# Altium PCB PCB1.PcbDoc
Units mil, origin at the board's own origin, x right, y up, seen from the top; angles counter-clockwise.
Board outline 3149.61 x 2362.2 mil, 2 copper layers (Top Layer, Bottom Layer); 83 components, 35 nets, 221 pads, 56 vias.
Unrouted connection lines stored in the file: 39.
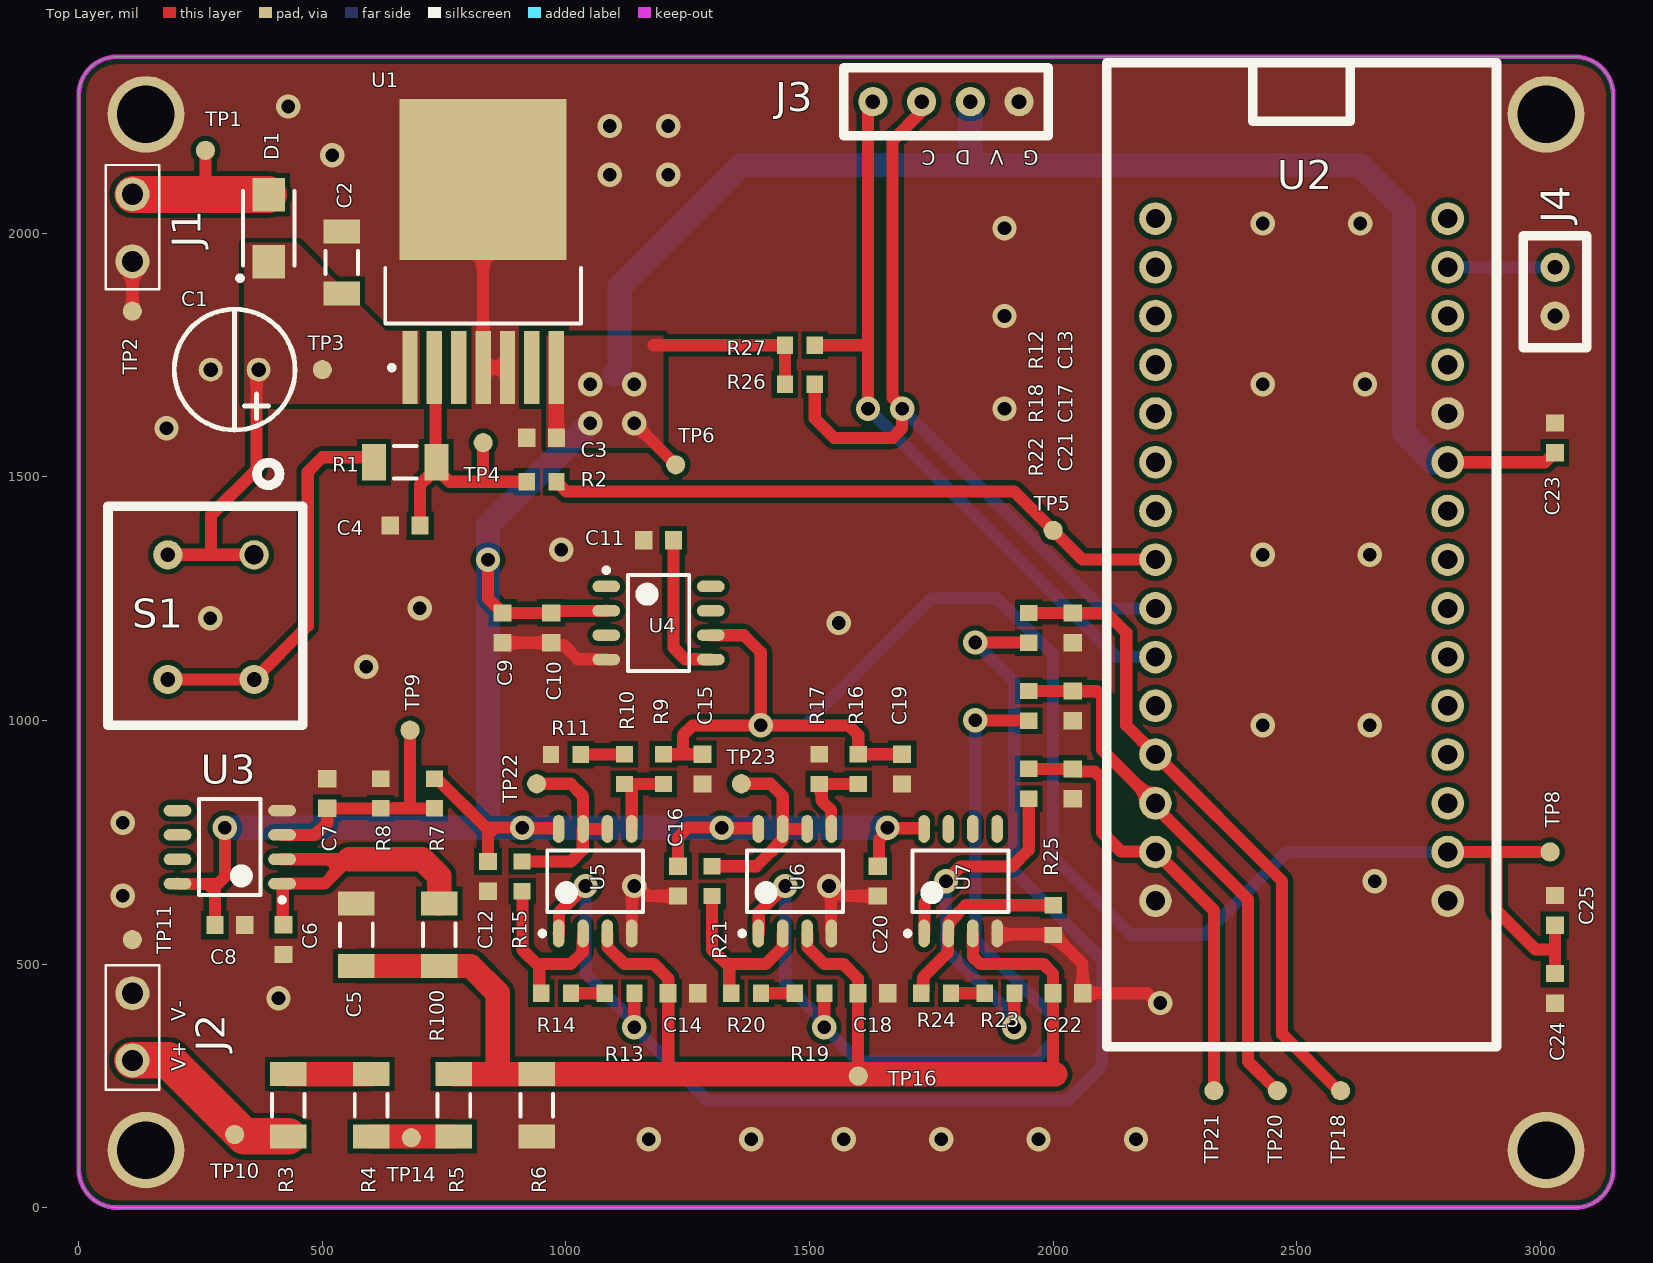
[diagram p0: Top Layer view]
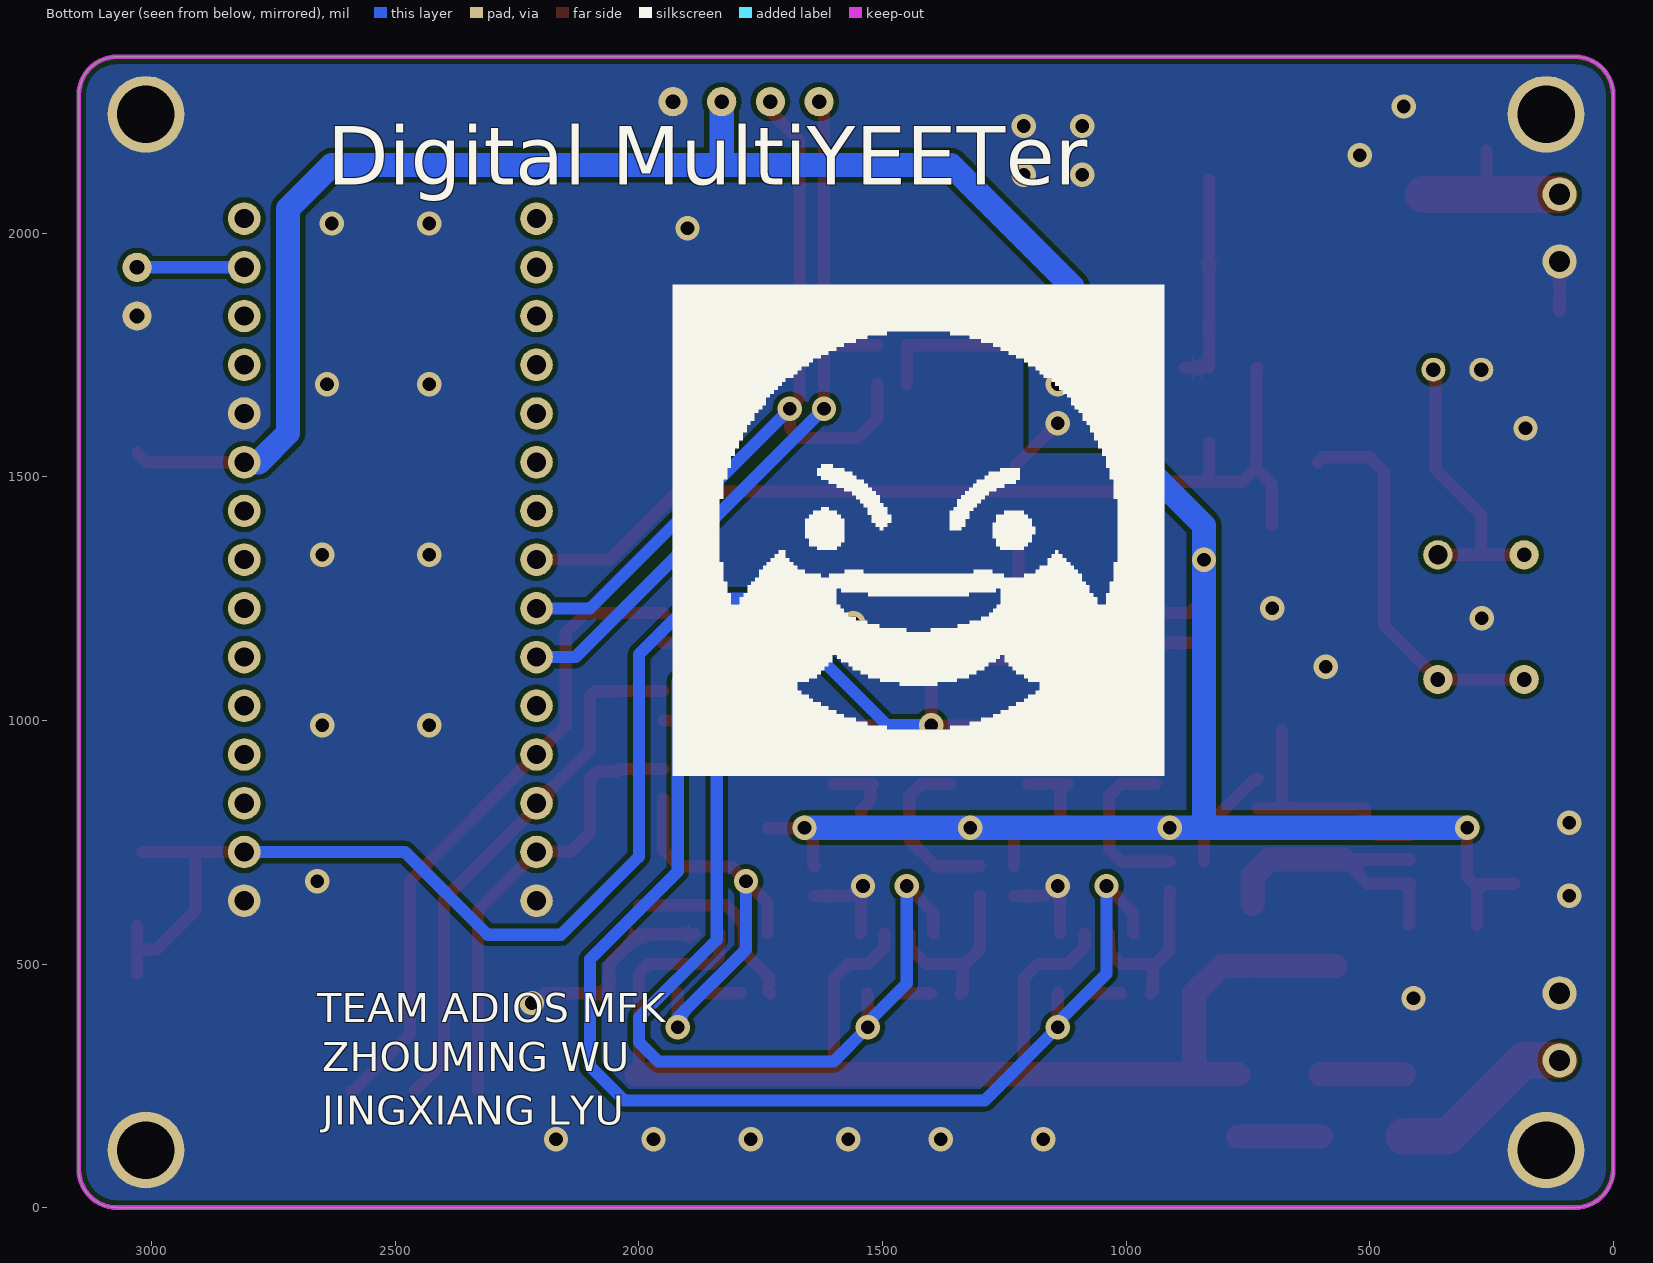
[diagram p1: Bottom Layer view, seen from below]
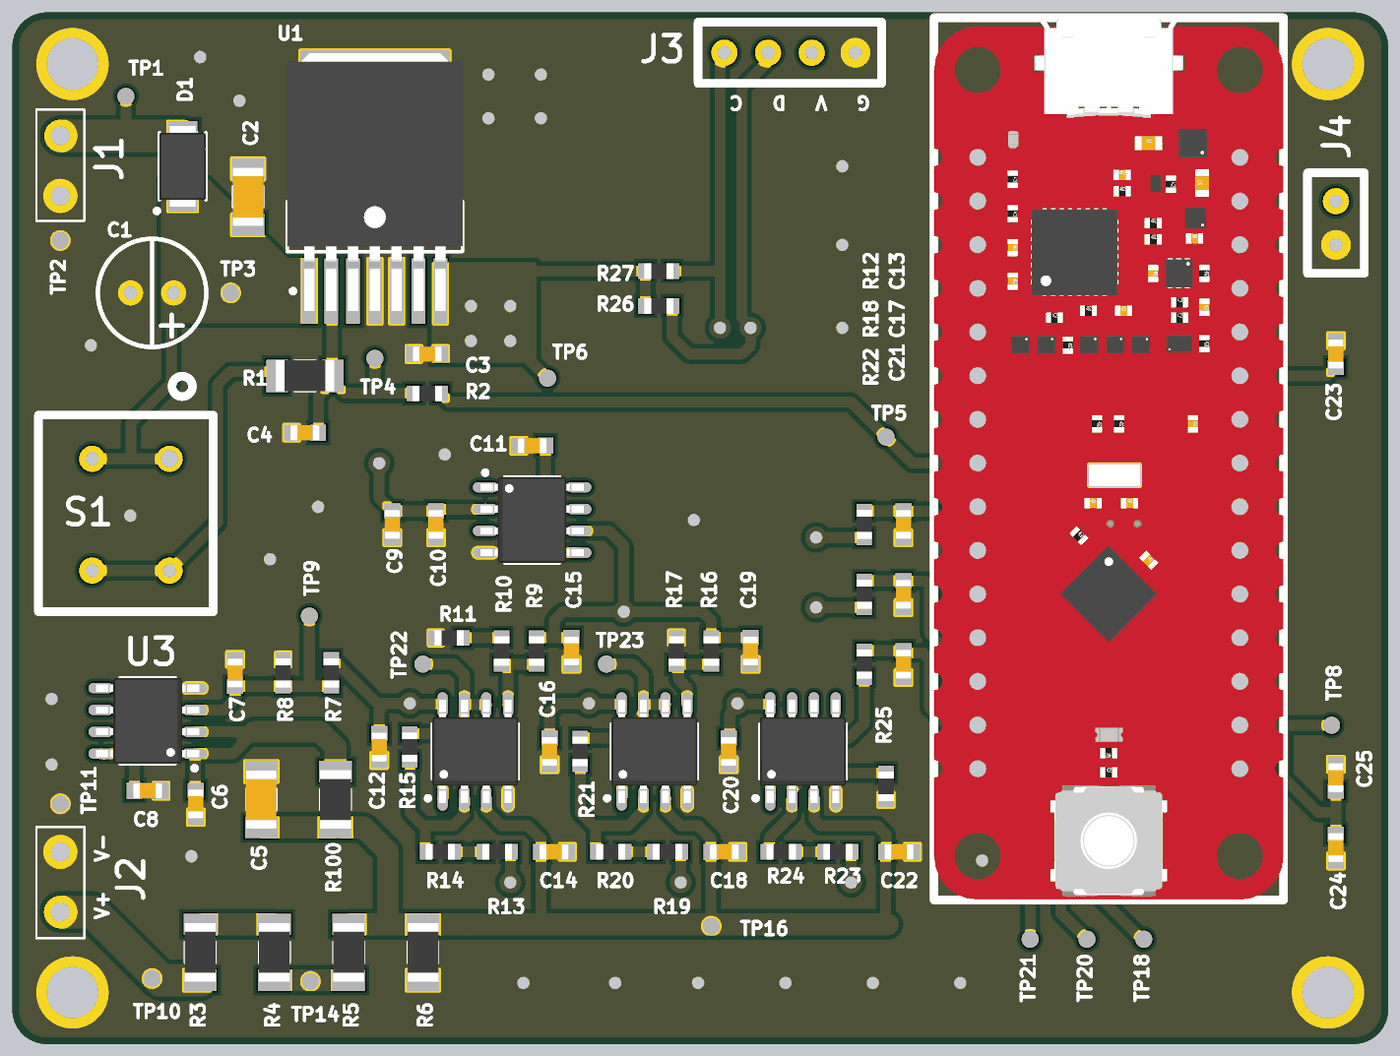
[diagram p2: 3D render of the assembled board from above, using the file's embedded part models]

## Layer stack, top to bottom
Top Solder: solder mask 0.4, Solder Resist, Dk 3.5
Top Layer: signal copper 1.4
Dielectric 1: dielectric 12.6, FR-4, Dk 4.8
Bottom Layer: signal copper 1.4
Bottom Solder: solder mask 0.4, Solder Resist, Dk 3.5

## Board outline
0,78.74 0,2283.46 cw(c78.74,2283.46) 78.74,2362.2 3070.87,2362.2 cw(c3070.87,2283.46) 3149.61,2283.46 3149.61,78.74 cw(c3070.87,78.74) 3070.87,0 78.74,0 cw(c78.74,78.74)

## Design rules (kind name [scope] priority, off if disabled: settings)
Clearance [All] p1: gap=10 ignorepadtopadclearanceinfootprint=FALSE except(0: Arc-Text Arc-Hole Track-Text Track-Hole SMDPad-Text SMDPad-Hole THPad-Text THPad-Hole Via-Text Via-Hole Fill-Text Fill-Hole Poly-Text Poly-Hole Region-Text Region-Hole Text-Text Text-Hole)
HoleSize [All] p1: absolutevalues=TRUE maxlimit=1000 minlimit=1 maxpercent=80.000 minpercent=20.000
PolygonConnect [All] p1: connectstyle=Direct reliefconductorwidth=10 reliefentries=4 polygonreliefangle="90 Angle" airgapwidth=10
RoomDefinition Sheet1 [InComponentClass('Sheet1')] p1 off: confinementstyle=ConfineIn formatcopy=TRUE lockcomponents=FALSE outline 6245,8095 6455,8095 6455,7970 6245,7970
RoutingVias [All] p1: holewidth=28 width=50 viastyle="Through Hole" minholewidth=28 minwidth=50 maxholewidth=28 maxwidth=50
SolderMaskExpansion [All] p1: expansion=4
Width [All] p1: maxlimit=500 minlimit=10 preferedwidth=25 minimp=50.000000 maximp=50.000000 favimp=50.000000
29 further rules are at their usual default settings.

## Components (designator, comment, footprint, x,y, rotation, side; value= is the part's Value field where it differs from the comment)
C1 "ALCAP_47u" 47u_cap 320,1720 r180 top
C2 "1206_100n" CAPC3216X10M 540,1940 r270 top
C3 "0603_1u" CAP_0603 950,1580 r0 top
C4 "0603_0.1u" CAP_0603 670,1400 r0 top
C5 "1206_33n" CAPC3216X10M 570,560 r90 top
C6 "0603_0.1u" CAP_0603 420,550 r270 top
C7 "0603_0.1u" CAP_0603 510,850 r270 top
C8 "0603_0.1u" CAP_0603 310,580 r180 top
C9 "0603_0.1u" CAP_0603 870,1190 r90 top
C10 "0603_1n" CAP_0603 970,1190 r90 top
C11 "0603_0.1u" CAP_0603 1190,1370 r0 top
C12 "0603_0.1u" CAP_0603 840,680 r90 top
C13 "0603_10n" CAP_0603 2040,1190 r90 top
C14 "0603_1u" CAP_0603 1240,440 r180 top
C15 "0603_0.1u" CAP_0603 1280,900 r90 top
C16 "0603_0.1u" CAP_0603 1230,670 r90 top
C17 "0603_10n" CAP_0603 2040,1030 r90 top
C18 "0603_0.1u" CAP_0603 1630,440 r180 top
C19 "0603_0.1u" CAP_0603 1690,900 r90 top
C20 "0603_0.1u" CAP_0603 1640,670 r90 top
C21 "0603_10n" CAP_0603 2040,870 r90 top
C22 "0603_0.1u" CAP_0603 2030,440 r180 top
C23 "0603_0.1u" CAP_0603 3030,1580 r90 top
C24 "0603_0.1u" CAP_0603 3030,450 r270 top
C25 "0603_10n" CAP_0603 3030,610 r90 top
D1 "RBR3LAM60BTF_diode" RBR3LAM60BTF_diode 390,2010 r90 top
J1 "2-pin terminal" "2-pin terminal" 110,2080 r270 top
J2 "2-pin terminal" "2-pin terminal" 110,302.2 r90 top
J3 "LCD Display" "LCD Display" 1930,2270 r180 top
J4 "2pin_jumper" 2pin_jumper 3030,1930 r270 top
R1 "1206 1M" RESC3216X10M 670,1530 r180 top
R2 "0603 1k" RES_0603 950,1490 r0 top
R3 "1206 1M" RESC3216X10M 430,210 r270 top
R4 "1206 1M" RESC3216X10M 600,210 r90 top
R5 "1206 1M" RESC3216X10M 770,210 r270 top
R6 "1206 1M" RESC3216X10M 940,210 r90 top
R7 "0603 10k" RES_0603 730,850 r90 top
R8 "0603 20k" RES_0603 620,850 r270 top
R9 "0603 10k" RES_0603 1200,900 r90 top
R10 "0603 226ohm" RES_0603 1120,900 r270 top
R11 "0603 5.1k" RES_0603 1000,930 r0 top
R12 "0603 100ohm" RES_0603 1950,1190 r270 top
R13 "0603 1.8k" RES_0603 1110,440 r0 top
R14 "0603 140k" RES_0603 980,440 r0 top
R15 "0603 1k" RES_0603 910,680 r270 top
R16 "0603 10k" RES_0603 1600,900 r90 top
R17 "0603 5.1k" RES_0603 1520,900 r270 top
R18 "0603 100ohm" RES_0603 1950,1030 r270 top
R19 "0603 3.48k" RES_0603 1500,440 r0 top
R20 "0603 10k" RES_0603 1370,440 r0 top
R21 "0603 1k" RES_0603 1300,670 r270 top
R22 "0603 100ohm" RES_0603 1950,870 r270 top
R23 "0603 220ohm" RES_0603 1890,440 r0 top
R24 "0603 4.12k" RES_0603 1760,440 r0 top
R25 "0603 10k" RES_0603 2000,590 r90 top
R26 "0603 4.7k 5%" RES_0603 1480,1690 r180 top
R27 "0603 4.7k 5%" RES_0603 1480,1770 r0 top
R100 "1206 1M" RESC3216X10M 740,560 r90 top
S1 "RESET_SW" RST_SW 360,1340 r270 top
TP1 "TP" TP 260,2170 r90 top
TP2 "TP" TP 110,1840 r90 top
TP3 "TP" TP 500,1720 r90 top
TP4 "TP" TP 830,1570 r90 top
TP5 "TP" TP 2000,1390 r90 top
TP6 "TP" TP 1225.26,1524.74 r90 top
TP8 "TP" TP 3020,730 r90 top
TP9 "TP" TP 680,980 r90 top
TP10 "TP" TP 320,150 r90 top
TP11 "TP" TP 110,550 r90 top
TP14 "TP" TP 682.5,143.52 r90 top
TP16 "TP" TP 1600,270 r90 top
TP18 "TP" TP 2590,240 r90 top
TP20 "TP" TP 2460,240 r90 top
TP21 "TP" TP 2330,240 r90 top
TP22 "TP" TP 940,870 r90 top
TP23 "TP" TP 1360,870 r90 top
U1 "TLS850F0TAV50" TLS850F0TAV50 680,1724.17 r90 top
U2 "pic_controller" nano 2210,2030 r0 top locked
U3 "opa2376aidr" opa2376aidr 310,740 r180 top
U4 "ref5040aidr" ref5040aidr 1190,1200 r0 top
U5 "opa2376aidr" opa2376aidr 1060,670 r90 top
U6 "opa2376aidr" opa2376aidr 1470,670 r90 top
U7 "opa2376aidr" opa2376aidr 1810,670 r90 top

## Footprints (in the part's own frame and the unit in brackets; to place one, negate y for a bottom-side part, rotate by r counter-clockwise, add the part's x,y. Pads: shape width x height; smd on the part's side, far side on the other; paste and mask are expansions set on the pad)
"2-pin terminal" [mil]
  round 70 hole 43.31: 1(0,0) 2(137.8,0)
  silkscreen extent -60,-55 195,55
2pin_jumper [mil]
  round 60 hole 30: 1(0,0) 2(100,0)
  silkscreen extent -65,-65 165,65
47u_cap [mm]
  round 1.25 hole 0.762: 1(-1.25,0) 2(1.25,0)
  silkscreen extent -3.15,-3.15 3.15,3.15
CAP_0603 [mm] "Chip Capacitor, 2-Leads, Body 1.60x0.80mm, IPC Medium Density"
  rect 0.9x0.95 smd: 1(-0.775,0) 2(0.775,0)
  body extent -0.85,-0.45 0.85,0.45, height 0.5
CAPC3216X10M [mm] "Chip Capacitor, 2-Leads, Body 3.20x1.60mm, IPC Low Density"
  rect 1.25x1.9 smd: 1(-1.625,0) 2(1.625,0)
  silkscreen extent -0.6,-0.85 0.6,0.85, body extent -1.7,-0.9 1.7,0.9, height 0.95
"LCD Display" [mil]
  round 60 hole 30: 1(0,0) 2(100,0) 3(200,0) 4(300,0)
  silkscreen extent -60,-70 360,70
nano [mm]
  round 1.7 hole 1: 1(0,0) 2(0,-2.54) 3(0,-5.08) 4(0,-7.62) 5(0,-10.16) 6(0,-12.7) 7(0,-15.24) 8(0,-17.78) 9(0,-20.32) 10(0,-22.86) 11(0,-25.4) 12(0,-27.94) 13(0,-30.48) 14(0,-33.02) 15(0,-35.56) 16(15.24,-35.56) 17(15.24,-33.02) 18(15.24,-30.48) 19(15.24,-27.94) 20(15.24,-25.4) 21(15.24,-22.86) 22(15.24,-20.32) 23(15.24,-17.78) 24(15.24,-15.24) 25(15.24,-12.7) 26(15.24,-10.16) 27(15.24,-7.62) 28(15.24,-5.08) 29(15.24,-2.54) 30(15.24,0)
  silkscreen extent -2.54,-43.18 17.78,8.13, body extent -2.54,-43.17 17.78,8.13, height 5.07
opa2376aidr [mm] "SOIC, 8-Leads, Body 4.91x3.90mm, Pitch 1.27mm, IPC Medium Density"
  oval 1.45x0.6 smd: 1(-2.725,1.905) 2(-2.725,0.635) 3(-2.725,-0.635) 4(-2.725,-1.905) 5(2.725,-1.905) 6(2.725,-0.635) 7(2.725,0.635) 8(2.725,1.905)
  silkscreen extent -2.85,-2.5 1.6,2.88, body extent -3,-2.5 3,2.5, height 1.75
RBR3LAM60BTF_diode [mm] "SODFL, 2-Leads, Body 2.50x4.70mm, IPC Medium Density"
  rect 1.75x1.7 smd: 1(-1.75,0) 2(1.75,0)
  silkscreen extent -2.72,-1.35 1.95,1.62, body extent -2.35,-1.35 2.35,1.35, height 1.05
ref5040aidr [mm] "SOIC, 8-Leads, Body 4.91x3.90mm, Pitch 1.27mm, IPC Medium Density"
  oval 1.45x0.6 smd: 1(-2.725,1.905) 2(-2.725,0.635) 3(-2.725,-0.635) 4(-2.725,-1.905) 5(2.725,-1.905) 6(2.725,-0.635) 7(2.725,0.635) 8(2.725,1.905)
  silkscreen extent -2.85,-2.5 1.6,2.88, body extent -3,-2.5 3,2.5, height 1.75
RES_0603 [mm] "Chip Resistor, 2-Leads, Body 1.60x0.80mm, IPC Medium Density"
  rect 0.85x0.9 smd: 1(-0.775,0) 2(0.775,0)
  body extent -0.85,-0.45 0.85,0.45, height 0.5
RESC3216X10M [mm] "Chip Resistor, 2-Leads, Body 3.20x1.60mm, IPC Low Density"
  rect 1.25x1.9 smd: 1(-1.625,0) 2(1.625,0)
  silkscreen extent -0.6,-0.85 0.6,0.85, body extent -1.7,-0.9 1.7,0.9, height 0.95
RST_SW [mil]
  round 60 hole 39.37: 1(0,0)
  round 60 hole 30: 2(0,-177.17) 3(255.91,0) 4(255.91,-177.17)
  silkscreen extent -189,-300 350,100
TLS850F0TAV50 [mm]
  rect 3.8x0.8 smd: 1(0,0) 2(0,-1.27) 3(0,-2.54) 4(0,-3.81) 5(0,-5.08) 6(0,-6.35) 7(0,-7.62)
  rect 8.4x8.7 smd: 5(9.8,-3.81)
  silkscreen extent -0.12,-8.91 5.2,1.29, body extent -1.15,-8.91 13.85,1.29, height 4.5
TP [mm]
  round 1 smd: 1(0,0)

## Part data
C1: library part ALCAP_47UF, "ALCAP", ComponentLink1Description=EEUFR1J470, ComponentLink1URL=https://www.digikey.com/product-detail/en/panasonic-electronic-components/EEU-FR1J470/P15400-ND/3072280
C2 C5: library part CAP_1206, "CAP_1206", ComponentLink1Description=C1206C104K5RAC7800, ComponentLink1URL=https://www.digikey.com/product-detail/en/kemet/C1206C104K5RAC7800/399-C1206C104K5RAC7800CT-ND/411524
C3 C4 C6 C7 C8 C9 C10 C11 C12 C13 C14 C15 C16 C17 C18 C19 C20 C21 C22 C23 C24 C25: library part CAP_0603, "CAP_0603", ComponentLink1Description=C0603C105K4RACTU, ComponentLink1URL=https://www.digikey.com/product-detail/en/kemet/C0603C105K4RACTU/399-7847-1-ND/3471570
R1 R2 R7 R8 R9 R10 R11 R12 R13 R14 R15 R16 R17 R18 R19 R20 R21 R22 R23 R24 R25 R26 R27: library part RES_0603, "RES_0603 1/8 W"
  R13 R14 R19 R20 R23 R24: ComponentLink1Description=P162KDBCT-ND, ComponentLink1URL=https://www.digikey.com/product-detail/en/panasonic-electronic-components/ERA-8AEB302V/P3.0KBCCT-ND/3069729
R3 R4 R5 R6 R100: library part RES_1206
  R3: ComponentLink1Description=P3.0KBCCT-ND, ComponentLink1URL=https://www.digikey.com/product-detail/en/panasonic-electronic-components/ERA-8AEB302V/P3.0KBCCT-ND/3069729
  R4: ComponentLink1Description=PAT900CCT-ND, ComponentLink1URL=https://www.digikey.com/product-detail/en/vishay-thin-film/PAT1206E9000BST1/PAT900CCT-ND/2279070
  R5: ComponentLink1Description=P90.9BCCT-ND, ComponentLink1URL=https://www.digikey.com/product-detail/en/panasonic-electronic-components/ERA-8AEB90R9V/P90.9BCCT-ND/3069989
  R6 R100: ComponentLink1Description=RT1206BRD0710RL, ComponentLink1URL=https://www.digikey.com/product-detail/en/yageo/RT1206BRD0710RL/YAG2330CT-ND/5252444
D1: ComponentLink1Description=RBR3LAM60BTF, ComponentLink1URL=https://www.digikey.com/product-detail/en/rohm-semiconductor/RBR3LAM60BTFTR/RBR3LAM60BTFCT-ND/8702638
S1: ComponentLink1Description=450-1650-ND, ComponentLink1URL=https://www.digikey.com/product-detail/en/te-connectivity-alcoswitch-switches/1825910-6/450-1650-ND/1632536
U1: ComponentLink1Description=TLS850F0TAV50, ComponentLink1URL=https://www.digikey.com/product-detail/en/infineon-technologies/TLS850F0TAV50ATMA1/TLS850F0TAV50ATMA1CT-ND/5824338
U3 U5 U6 U7: ComponentLink1Description=opa2376aidr, ComponentLink1URL=https://www.digikey.com/product-detail/en/texas-instruments/OPA2376AIDR/296-22564-1-ND/1669056
U4: ComponentLink1Description=ref5040aidr, ComponentLink1URL=https://www.digikey.com/product-detail/en/texas-instruments/REF5040AIDR/296-46190-1-ND/7033365

## Free pads (board coordinates)
  round 157.48 hole 118.11: 0(137.8,118.11) 0(137.8,2244.09) 0(3011.81,118.11) 0(3011.81,2244.09)

## Via types
v1: diameter 50, hole 28, Top Layer to Bottom Layer, tented both sides, 56 vias

## Nets (pads, with @x,y where several pads share a name; then routed paths per layer and width w, separated by ;. In a path a pad name is that pad's centre, name@x,y a point inside that pad or via, vN(x,y) a via of type N, cw(c..) or ccw(c..) an arc to the next point about the centre after c; other vN are vias at no path point)
+5: C3.2 C8.2 C9.2 C10.2 C12.2 C16.2 C20.2 C23.1 J3.2 R7.2 R26.2 R27.1 TP6.1 U1.7 U2.25 U3.8 U4.2 U5.8 U6.8 U7.8 | length 7163.4
  Top Layer w10: C3.2@980,1580.51 C3.2
  Top Layer w25: U3.8 203.41,664.31 264.84,664.31 ; C8.2 279.49,649.67 264.84,664.31 ; v1(300,780) 300,678.96 285.36,664.31 264.84,664.31 ; R7.2@729.02,880.51 R7.2 734.23,876.28 739.48,876.28 835.76,780 854.64,780 ; C12.2 840,765.36 854.64,780 ; v1(840,1330) 840,1250.51 863.8,1226.71 863.8,1225.73 869.02,1220.51 C9.2 C10.2 973.8,1224.31 1082.03,1224.31 U4.2 ; U5.8 985,777.95 984.31,778.64 911.36,778.64 v1(910,780) 854.64,780 ; v1(1140,1610) TP6.1 ; 1180,1770 R27.1 ; C16.2 1230,760 1250,780 v1(1320,780) 1321.36,778.64 1394.31,778.64 1395,777.95 U6.8 ; R27.1@1448.98,1769.49 1449.49,1768.98 R26.2 ; C20.2 1642.49,703.01 1642.49,755.73 1660,773.24 v1(1660,780) 1661.36,778.64 1734.31,778.64 1735,777.95 U7.8 ; U2.25 3009.53,1530 C23.1@3029.02,1549.49
  Top Layer w30: C3.2@980,1580.51 U1.7
  Bottom Layer w50: v1(300,780) 840,780 ; v1(1050,1610) 840,1400 v1(840,1330) 840,780 ; 1100,1710 1110,1720 1110,1890 1360,2140 1830,2140 ; v1(1660,780) v1(1320,780) v1(910,780) 840,780 ; J3.2 1830,2140 ; U2.25 2780,1530 2720,1590 2720,2050 2630,2140 1830,2140
  other v1: 1050,1690 1140,1690
GND: C1.2 C2.1 C3.1 C4.1 C5.2 C6.2 C7.1 C8.1 C9.1 C10.1 C11.1 C12.1 C13.1 C14.1 C15.1 C16.1 C17.1 C18.1 C19.1 C20.1 C21.1 C22.1 C23.2 C24.2 C25.2 J1.2 J2.2 J3.1 J4.2 pad.0 R6.1 R8.1 R11.1 R17.1 R25.1 TP2.1 TP11.1 U1.4 U1.5 U2.15 U2.16 U2.26 U3.4 U4.4 U5.4 U6.4 U7.4 | length 1584.8
  Top Layer w25: TP2.1 J1.2 ; U1.5@830,2110 U1.4 U1.5@880,1724.17 ; C9.1 C10.1 975.22,1154.27 995.73,1154.27 1024.31,1125.69 1082.03,1125.69 U4.4 ; U5.4 1135.69,563.41 1135.69,655.69 1151.08,655.69 1167.28,639.49 C16.1 ; U6.4 1544.31,563.41 1544.31,655.69 1551.08,655.69 1567.28,639.49 C20.1 ; U7.4 1885,561.79 1885.69,561.1 1998.39,561.1 R25.1 2000.98,559.49 2060.51,499.96 C22.1 2193.24,440 2213.24,420 v1(2220,420)
  other v1: 1170,140 1380,140 1570,140 1770,140 1970,140 2170,140 410,430 90,640 1140,660 1540,660 2660,670 90,790 2430,990 2650,990 590,1110 1560,1200 270,1210 700,1230 2430,1340 2650,1340 990,1350 180,1600 1900,1640 2430,1690 2640,1690 1900,1830 1900,2010 2430,2020 2630,2020 1090,2120 1210,2120 520,2160 1090,2220 1210,2220 430,2260
NetC1_1: C1.1 C2.2 D1.1 S1.1 S1.2 TP3.1 U1.1 | length 604.2
  Top Layer w25: S1.2 271.42,1340 ; S1.1@364.61,1344.61 S1.1 271.42,1340 ; C1.1 364.61,1715.39 364.61,1514.61 271.42,1421.42 271.42,1340
NetC4_2: C4.2 R1.1 R2.1 TP4.1 U1.2 | length 616.5
  Top Layer w25: C4.2 700.51,1483.74 R1.1@733.98,1517.2 ; U1.2 731.99,1722.18 731.99,1531.99 R1.1 R1.1@733.98,1517.2 ; TP4.1 830,1490 ; R2.1 830,1490 ; R1.1@733.98,1517.2 761.18,1490 830,1490
NetC5_1: C5.1 C14.2 C18.2 C22.2 R5.1 R6.2 R100.1 TP16.1 U5.3 U6.3 U7.3 | length 2881.3
  Top Layer w25: R100.1 R100.1@752.8,496.02 ; U5.3 1085,535 1120,500 1180.47,500 1209.49,470.98 1209.49,470 1210,469.49 1210,273.98 ; U6.3 1495.69,562.03 1495.69,534.31 1530,500 1569.49,500 1599.49,470 C18.2 1599.49,300.51 1600,300 ; U7.3@1835,535 U7.3 1835.69,562.03 1835.69,514.64 1850.33,500 1980,500 2000,480 2000,440.51 C22.2 1999.49,278.46 2003.98,273.98
  Top Layer w50: C5.1 R100.1 ; R100.1@752.8,496.02 803.98,496.02 860,440 860,273.98 ; R5.1 860,273.98 ; 2003.98,273.98 1210,273.98 R6.2 860,273.98
NetC6_1: C6.1 R100.2 U3.1 U3.2 | length 637
  Top Layer w25: U3.1 U3.1@417.95,665 ; U3.2 555,715 505,665 U3.1@417.95,665 ; C6.1 418.64,581.87 418.64,664.31 U3.1@417.95,665
  Top Layer w50: 555,715 705,715 740,680 R100.2
NetC7_2: C7.2 R7.1 R8.2 TP9.1 U3.3 | length 515.1
  Top Layer w25: U3.3 485,765 510,790 C7.2 R8.2 675,819.49 ; TP9.1 680,824.49 675,819.49 ; R7.1 675,819.49
NetC11_2: C11.2 U4.5 | length 307.4
  Top Layer w25: C11.2 1220.51,1149.49 1244.31,1125.69 1296.59,1125.69 U4.5
NetC13_2: C13.2 R12.1 TP18.1 U2.12 | length 1341.3
  Top Layer w25: R12.1 C13.2 2040.51,1220 2110,1220 2150,1180 2150,990 U2.12 2470,670 2470,356.11 2586.11,240 TP18.1
NetC15_2: C15.2 C19.2 C24.1 C25.1 R9.2 R16.2 TP8.1 U2.17 U4.6 | length 3591.9
  Top Layer w25: R9.2 1240.49,930.51 C15.2 ; 1240.47,930.53 1240.47,970 1260.24,989.76 v1@1400,989.76 ; U4.6 1365,1175 1400,1140 v1@1400,989.76 ; C19.2 R16.2 1600,970 1580.24,989.76 v1@1400,989.76 ; U2.17 2910,730 ; TP8.1 2910,730 ; C24.1 3030,530 ; C25.1 3030,530 ; 2910,730 2910,610 2990,530 3030,530
  Bottom Layer w25: v1(1399.74,990.02) 1490.02,990.02 1750,1250 1885.36,1250 2000,1135.36 2000,720 2160,560 2310,560 2480,730 U2.17
NetC17_2: C17.2 R18.1 TP20.1 U2.13 | length 1113.5
  Top Layer w25: R18.1 C17.2 2040.51,1060 2090,1060 2100,1050 2100,940 U2.13 2210,822.82 2400,632.82 2400,300 TP20.1
NetC21_2: C21.2 R22.1 TP21.1 U2.14 | length 935.2
  Top Layer w25: R22.1 C21.2 2045.22,895.3 2085.36,895.3 2100,880.65 2100,770 2139.04,730.96 2209.04,730.96 U2.14 2330,610 TP21.1
NetD1_2: D1.2 J1.1 TP1.1 | length 375.1
  Top Layer w25: J1.1 J1.1@110.55,2079.45 ; TP1.1 260,2089.45 270,2079.45 ; D1.2@389.45,2079.45 D1.2
  Top Layer w75: J1.1@110.55,2079.45 270,2079.45 D1.2@389.45,2079.45
NetJ3_3: J3.3 R26.1 U2.9 | length 1667.6
  Top Layer w25: R26.1 1510.51,1619.49 1550,1580 1670,1580 1690,1600 v1(1690,1639.97) 1690,1642.82 1670,1662.82 1670,2190 1730,2250 J3.3
  Bottom Layer w25: v1(1690,1639.97) 2099.97,1230 U2.9
NetJ3_4: J3.4 R27.2 U2.10 | length 1544.9
  Top Layer w25: R27.2 1620,1770 ; v1(1620,1640) 1620,1770 ; J3.4 1620,2260 1620,1770
  Bottom Layer w25: v1(1620,1640) 2130,1130 U2.10
NetJ4_1: J4.1 U2.29 | length 220
  Bottom Layer w25: U2.29 J4.1
NetR1_2: R1.2 S1.3 S1.4 | length 801.2
  Top Layer w25: S1.4 S1.3 470,1194.09 470,1510 500,1540 596.02,1540 R1.2
NetR2_2: R2.2 TP5.1 U2.8 | length 1295.8
  Top Layer w25: R2.2 1000.51,1470 1920,1470 TP5.1 2060,1330 U2.8
NetR3_1: R3.1 R4.2 | length 170
  Top Layer w50: R3.1 R4.2
NetR4_1: R4.1 R5.2 TP14.1 | length 177.1
  Top Layer w25: TP14.1@680,141.02 TP14.1@685,146.02
  Top Layer w50: R4.1 685,146.02 R5.2
NetR9_1: R9.1 R10.2 U5.5 | length 178
  Top Layer w25: R10.2 R10.2@1120.98,869.49 ; U5.5 1135,855.47 R10.2@1120.98,869.49 ; R9.1 R10.2@1120.98,869.49
NetR10_1: R10.1 R11.2 | length 89.7
  Top Layer w25: R11.2 1030.77,930.26 1119.74,930.26 R10.1
NetR12_2: R12.2 R13.2 U5.1 | length 2660.7
  Top Layer w25: U5.1 985.69,563.41 985.69,605.69 v1(1040,660) ; v1(1140,370) 1140.26,370.26 1140.26,439.74 R13.2 ; v1(1840,1160) 1840.26,1159.74 1949.74,1159.74 R12.2
  Bottom Layer w25: v1(1040,660) 1040,480 1140,380 v1(1140,370) 1290,220 2030,220 2100,290 2100,510 1920,690 1920,1080 v1(1840,1160)
NetR13_1: R13.1 R14.2 | length 69
  Top Layer w25: R14.2 R13.1
NetR14_1: R14.1 R15.2 U5.2 | length 359.5
  Top Layer w25: R15.2 910.98,649.49 910.98,529.02 945.26,494.74 945.26,444.23 R14.1 ; 950,500 1010,500 1034.31,524.31 1034.31,546.67 1035,547.36 U5.2
NetR16_1: R16.1 R17.2 U6.5 | length 188.1
  Top Layer w25: R17.2@1524.23,865.26 R17.2 R17.2@1520.98,869.49 ; U6.5 1544.31,777.97 1544.31,815.69 1525.22,834.78 1525.22,865.26 R17.2@1520.98,869.49 ; R16.1 R17.2@1520.98,869.49
NetR18_2: R18.2 R19.2 U6.1 | length 1865.5
  Top Layer w25: U6.1 1395.69,563.41 1395.69,605.69 v1(1450,660) ; v1(1530,370) 1530.26,370.26 1530.26,439.74 R19.2 ; v1(1840,1000) 1840.26,999.74 1949.74,999.74 R18.2
  Bottom Layer w25: v1(1450,660) 1450,460 1530,380 v1(1530,370) 1600,300 1960,300 2000,340 2000,390 1840,550 v1(1840,1000)
NetR19_1: R19.1 R20.2 | length 69
  Top Layer w25: R20.2 R19.1
NetR20_1: R20.1 R21.2 U6.2 | length 367.8
  Top Layer w25: R21.2 1300,530 1335.26,494.74 1335.26,444.23 R20.1 ; 1335.26,500 1410,500 1444.31,534.31 1444.31,562.03 U6.2
NetR22_2: R22.2 R23.2 U7.1 | length 855.7
  Top Layer w25: U7.1 1735.69,563.41 1735.69,625.69 v1(1780,670) 1810,700 1915.36,700 1950,734.64 R22.2 ; v1(1920,370) 1920.26,370.26 1920.26,439.74 R23.2
  Bottom Layer w25: v1(1780,670) 1780,530 1920,390 v1(1920,370)
NetR23_1: R23.1 R24.2 | length 69
  Top Layer w25: R24.2 R23.1
NetR24_1: R24.1 R25.2 U7.2 | length 397.7
  Top Layer w25: R24.1 1733.72,444.23 1733.72,473.72 1784.31,524.31 1784.31,562.03 U7.2 1785,585 1820.51,620.51 R25.2
Vin+: J2.1 R3.2 TP10.1 | length 384.7
  Top Layer w75: J2.1 183.82,302.2 340,146.02 R3.2
VREFCHA: R15.1 TP22.1 U5.6 U5.7 | length 400.5
  Top Layer w25: R15.1 1010.51,710.51 1034.31,734.31 1034.31,776.59 U5.7 ; TP22.1 1010,870 1035,845 U5.7 ; U5.6 U5.7
VREFCHB: R21.1 TP23.1 U6.6 U6.7 | length 402.9
  Top Layer w25: R21.1 1390.51,700.51 1444.31,754.31 1444.31,776.59 U6.7 ; TP23.1 1420,870 1445,845 U6.7 ; U6.6 U6.7
pads on no net: U1.3 U1.6 U2.1 U2.2 U2.3 U2.4 U2.5 U2.6 U2.7 U2.11 U2.18 U2.19 U2.20 U2.21 U2.22 U2.23 U2.24 U2.27 U2.28 U2.30 U3.5 U3.6 U3.7 U4.1 U4.3 U4.7 U4.8 U7.5 U7.6 U7.7

## Polygon pours and split planes (outlines as drawn)
GND on Top Layer "GND_L01_P008" (solid, remove dead copper, pour order 8): 0,78.74 0,2283.46 cw(c78.74,2283.46) 78.74,2362.2 3070.87,2362.2 cw(c3070.87,2283.46) 3149.61,2283.46 3149.61,78.74 cw(c3070.87,78.74) 3070.87,0 78.74,0 cw(c78.74,78.74)
+5 on Top Layer "+5_L01_P002" (solid, remove dead copper, pour order 2): 960,1790 1200,1790 1200,1560 960,1560
NetC1_1 on Top Layer "NETC1_1_L01_P000" (solid, remove dead copper, pour order 0): 340,1980 450,1980 630,1800 700,1800 700,1650 340,1650
GND on Bottom Layer "GND_L02_P007" (solid, remove dead copper, pour order 7): 0,78.74 0,2283.46 cw(c78.74,2283.46) 78.74,2362.2 3070.87,2362.2 cw(c3070.87,2283.46) 3149.61,2283.46 3149.61,78.74 cw(c3070.87,78.74) 3070.87,0 78.74,0 cw(c78.74,78.74)
+5 on Bottom Layer "+5_L02_P004" (solid, remove dead copper, pour order 4): 960,1790 1200,1790 1200,1560 960,1560

## Keep-outs
Keep-Out Layer:
  the board outline again, w10

## Silkscreen, mask and mechanical layers (free items; w line width, h text height)
Top Overlay:
  text "V+   V-" at 220,280 h30 r90
Bottom Overlay:
  drawing of 5 lines, arcs and shapes, not listed
  text "Digital MultiYEETer" at 2640,2100 h120
  text "TEAM ADIOS MFK" at 2660,380 h60
  text "ZHOUMING WU" at 2650,280 h60
  text "JINGXIANG LYU" at 2650,170 h60

## Text inside footprints (layer, text, board x,y; h text height)
J3: Top Overlay "G   V   D   C" at 1970,2170 h30 r180